# Altium PCB Power.PcbDoc
Units mm, origin at the board's own origin, x right, y up, seen from the top; angles counter-clockwise.
Board outline 152.4 x 101.6 mm, 2 copper layers (Top Layer, Bottom Layer); 9 components, 8 nets, 54 pads, 0 vias.
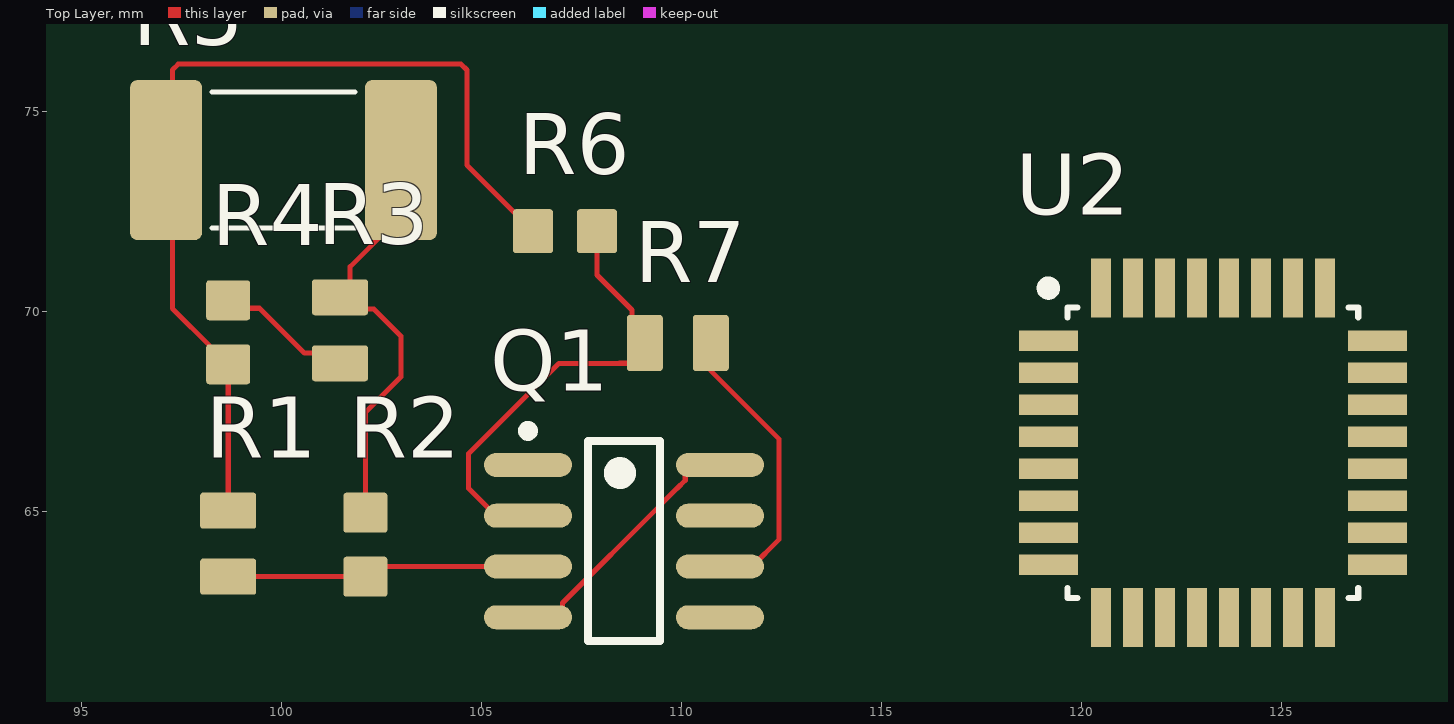
[diagram p0: Top Layer view]
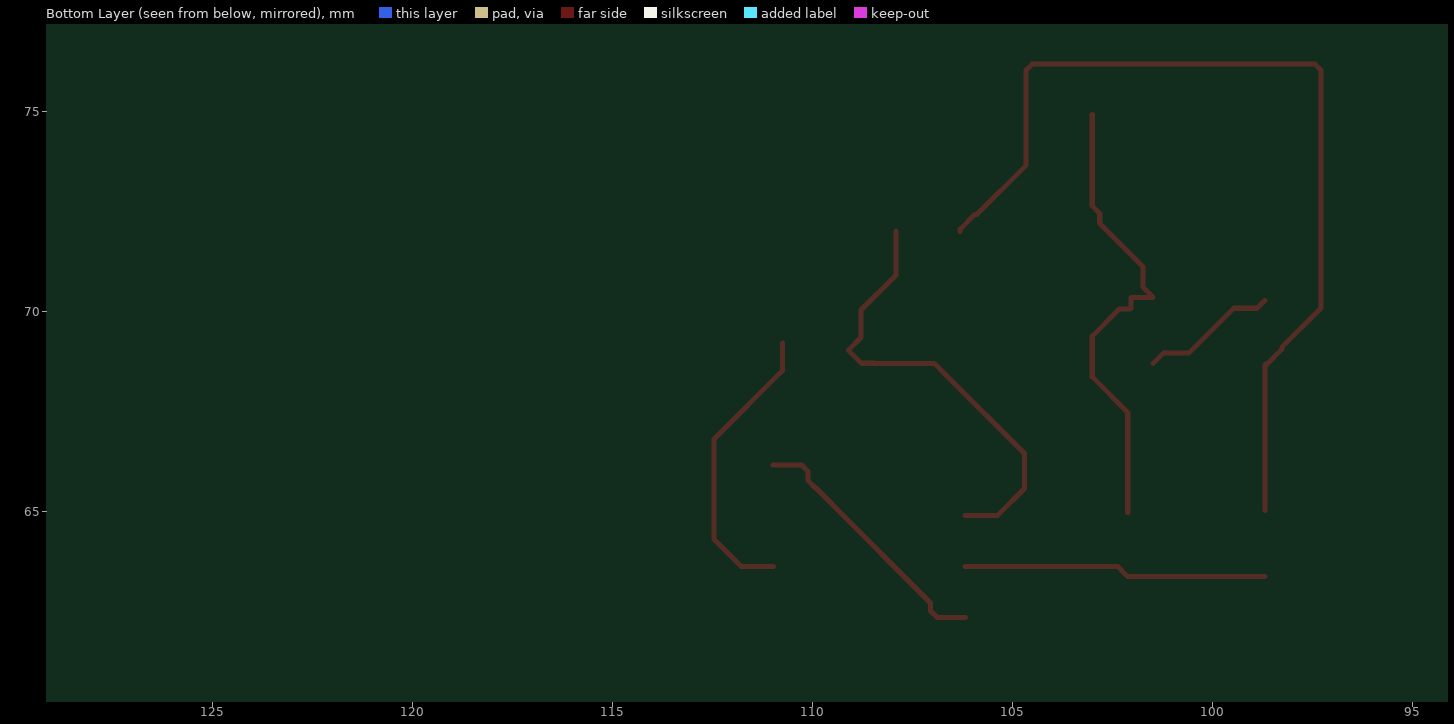
[diagram p1: Bottom Layer view, seen from below]
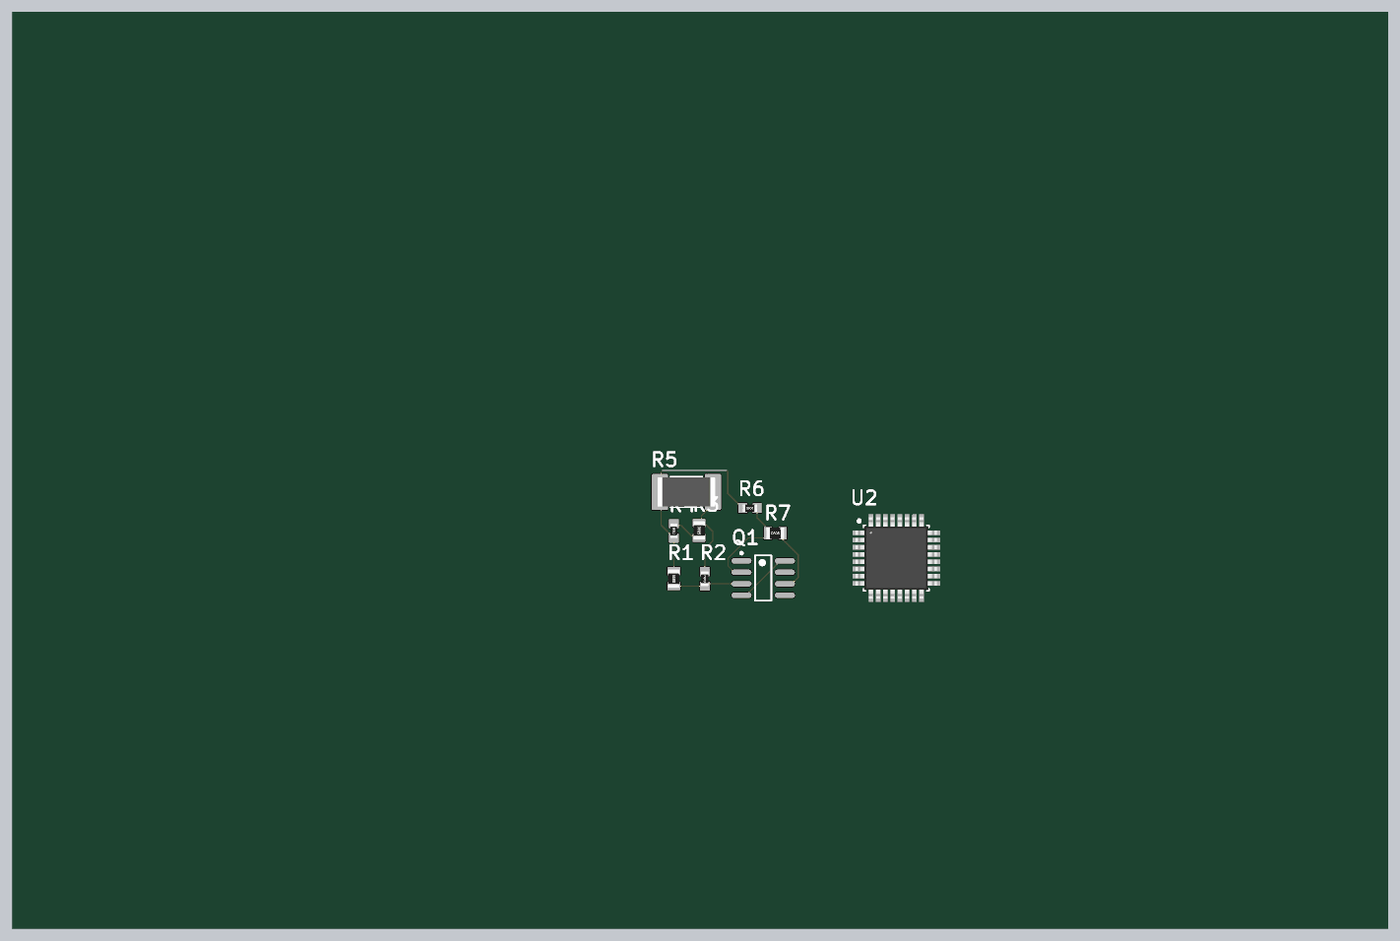
[diagram p2: 3D render of the assembled board from above, using the file's embedded part models]

## Layer stack, top to bottom
Top Solder: solder mask 0.0102, Solder Resist, Dk 3.5
Top Layer: signal copper 0.0356
Dielectric 1: dielectric 0.32, FR-4, Dk 4.8
Bottom Layer: signal copper 0.0356
Bottom Solder: solder mask 0.0102, Solder Resist, Dk 3.5

## Board outline
25.4,25.4 177.8,25.4 177.8,127 25.4,127

## Design rules (kind name [scope] priority, off if disabled: settings)
Clearance [All] p1: gap=0.254 ignorepadtopadclearanceinfootprint=FALSE
PolygonConnect [All] p1: connectstyle=Relief reliefconductorwidth=0.254 reliefentries=4 polygonreliefangle="90 Angle" airgapwidth=0.254
RoutingVias [All] p1: holewidth=0.711 width=1.27 viastyle="Through Hole" minholewidth=0.711 minwidth=1.27 maxholewidth=0.711 maxwidth=1.27
SolderMaskExpansion [All] p1: expansion=0.102 istentingtop=FALSE
SupplyNets "Schematic Supply Nets_2" [InNet('VIN')] p1: voltage=0.000
SupplyNets "Schematic Supply Nets_1" [InNet('GND')] p2: voltage=0.000
SupplyNets "Schematic Supply Nets" [InNet('5V')] p3: voltage=0.000
Width [All] p1: maxlimit=0.254 minlimit=0.254 preferedwidth=0.254
30 further rules are at their usual default settings.

## Classes and differential pairs
component class Power: Q1 R1 R2 R3 R4 R5 R6 R7
component class MCU: U2

## Components (designator, comment, footprint, x,y, rotation, side; value= is the part's Value field where it differs from the comment)
Q1 "OPAMP_CA3140AMZ" CA3140AMZ 108.572,64.262 r0 top
R1 "RES_10kΩ_0805_5%" RES0805 98.679,64.198 r90 top value=10kΩ
R2 "RES_1kΩ_0603_5%" RES0603 102.108,64.973 r270 top value=1kΩ
R3 "RES_10kΩ_0805_5%" RES0805 101.473,69.532 r270 top value=10kΩ
R4 "RES_1kΩ_0603_5%" RES0603 98.679,70.282 r270 top value=1kΩ
R5 "RES_1mΩ_2512_1%" RESC6532X75N 100.062,73.787 r180 top value=1mΩ
R6 "RES_1kΩ_0603_5%" RES0603 106.299,72.009 r0 top value=1kΩ
R7 "RES_10kΩ_0805_5%" RES0805 109.918,69.215 r0 top value=10kΩ
U2 "STM32F042K6T6TR" LQFP-32 123.298,66.472 r0 top

## Footprints (in the part's own frame and the unit in brackets; to place one, negate y for a bottom-side part, rotate by r counter-clockwise, add the part's x,y. Pads: shape width x height; smd on the part's side, far side on the other; paste and mask are expansions set on the pad)
CA3140AMZ [mm]
  oval 2.2x0.6 smd: 1(-2.4,1.905) 2(-2.4,0.635) 3(-2.4,-0.635) 4(-2.4,-1.905) 5(2.4,-1.905) 6(2.4,-0.635) 7(2.4,0.635) 8(2.4,1.905)
  silkscreen extent -2.52,-2.5 0.9,2.88, body extent -2,-2.5 2,2.5, height 1.75
LQFP-32 [mil]
  rect 58x20 smd paste+0 mask+0: 1(-162,110.24) 2(-162,78.74) 3(-162,47.24) 4(-162,15.75) 5(-162,-15.75) 6(-162,-47.24) 7(-162,-78.74) 8(-162,-110.24) 17(162,-110.24) 18(162,-78.74) 19(162,-47.24) 20(162,-15.75) 21(162,15.75) 22(162,47.24) 23(162,78.74) 24(162,110.24)
  rect 20x58 smd paste+0 mask+0: 9(-110.24,-162) 10(-78.74,-162) 11(-47.24,-162) 12(-15.75,-162) 13(15.75,-162) 14(47.24,-162) 15(78.74,-162) 16(110.24,-162) 25(110.24,162) 26(78.74,162) 27(47.24,162) 28(15.75,162) 29(-15.75,162) 30(-47.24,162) 31(-78.74,162) 32(-110.24,162)
  silkscreen extent -168,-143 143,168, body extent -177,-177 177,177, height 63
RES0603 [mm] "Chip Resistor, Body 1.6x0.8mm, IPC Medium Density"
  rrect15% 1x1.1 smd: 1(0,0) 2(1.6,0)
  body extent 0,-0.4 1.6,0.4, height 0.46
RES0805 [mm] "Chip Resistor, 2-Leads, Body 2.00x1.25mm, IPC High Density"
  rrect15% 0.9x1.4 smd: 1(-0.825,0) 2(0.825,0)
  body extent -1,-0.62 1,0.63, height 0.61
RESC6532X75N [mm]
  rrect20% 1.8x4 smd: 1(-2.935,0) 2(2.935,0)
  silkscreen extent -1.79,-1.7 1.79,1.7, body extent -3.17,-1.6 3.17,1.6, height 0.65

## Part data
Q1: "IC OPAMP GP 1 CIRCUIT 8SOIC", Manufacturer 1="Renesas Electronics America Inc.", Manufacturer Part Number 1=CA3140AMZ, Supplier Part Number 1=CA3140AMZ-ND, Supplier 1=Digi-Key
R1 R3 R7: "RES 10K OHM 5% 1/8W 0805", LCSC Part #=C17414, Manufacturer 1="Panasonic Electronic Components", Manufacturer Part Number 1=ERJ-6GEYJ103V, Package/Footprint=0805, Supplier Part Number 1=P10KACT-ND, Mounting Type=SMD, Supplier 1=Digi-Key
R2 R4 R6: "RES 1K OHM 5% 1/10W 0603", Manufacturer 1=Yageo, Manufacturer Part Number 1=RC0603JR-071KL, Package=0603, Supplier Part Number 1=311-1.0KGRCT-ND, Mounting Type=SMD, Supplier 1=Digi-Key
R5: "RES 1 mOHM 1% 3W 2512", Manufacturer 1=Riedon, Manufacturer Part Number 1=CSRL3-0R001F8, Package=2512, Supplier Part Number 1=696-1834-1-ND, Mounting Type=SMD, Supplier 1=Digi-Key
U2: "ARM® Cortex®-M0 STM32F0 Microcontroller IC 32-Bit Single-Core 48MHz 32KB (32K x 8) FLASH 32-LQFP (7x7)", Mfr_Name=STMicroelectronics, Operating Temperature="-40°C ~ 85°C (TA)", Package / Case=32-LQFP, Supplier Part Number 1=16AC3527, Voltage - Supply (Vcc/Vdd)="2V ~ 3.6V", ComponentLink1Description=digikey, ComponentLink1URL=https://www.digikey.com/en/products/detail/stmicroelectronics/STM32F042K6T6TR/10414582, Core Processor="ARM® Cortex®-M0", Core Size="32-Bit Single-Core", Program Memory Size="32KB (32K x 8)", Speed=48MHz, Supplier 1=Avnet

## Nets (pads, with @x,y where several pads share a name; then routed paths per layer and width w, separated by ;. In a path a pad name is that pad's centre, name@x,y a point inside that pad or via, vN(x,y) a via of type N, cw(c..) or ccw(c..) an arc to the next point about the centre after c; other vN are vias at no path point)
5V: Q1.4 Q1.8 | length 6.6
  Top Layer w0.127: Q1.4 106.878,62.357 107.038,62.517 107.038,62.715 109.491,65.168 109.491,65.179 109.89,65.578 109.901,65.578 110.106,65.783 110.106,66.007 110.266,66.167 Q1.8
GND: R1.2 R4.2 R5.2 R6.1 | length 23.9
  Top Layer w0.127: R1.2 R4.2 98.629,68.682 98.256,69.055 98.256,69.105 97.282,70.079 97.282,76.037 97.431,76.186 104.499,76.186 104.648,76.037 104.648,73.66 105.876,72.432 105.926,72.432 106.299,72.059 R6.1
NetQ1_2: Q1.2 R6.2 R7.1 | length 11.6
  Top Layer w0.127: Q1.2 105.372,64.897 104.691,65.578 104.691,66.449 106.676,68.435 106.948,68.706 108.457,68.706 108.459,68.708 108.77,68.708 109.094,69.032 108.776,69.35 108.776,70.04 107.899,70.917 R6.2
NetQ1_3: Q1.3 R1.1 R2.2 | length 7.6
  Top Layer w0.127: R1.1 R2.2 102.362,63.627 Q1.3
NetQ1_6: Q1.6 R7.2 | length 7.4
  Top Layer w0.127: R7.2 110.744,68.519 112.453,66.81 112.453,64.308 111.772,63.627 Q1.6
NetR3_2: R3.2 R4.1 | length 3.4
  Top Layer w0.127: R4.1 98.877,70.084 99.461,70.084 100.585,68.96 101.22,68.96 R3.2
NetU2_6: U2.6
VIN: R2.1 R3.1 R5.1 | length 12.1
  Top Layer w0.127: R2.1 102.108,67.479 102.997,68.368 102.997,69.384 102.319,70.062 102.046,70.062 102.024,70.084 102.024,70.357 R3.1 101.727,70.611 101.727,71.123 102.808,72.204 102.808,72.454 102.997,72.643 R5.1 R5.1@102.997,74.93
pads on no net: Q1.1 Q1.5 Q1.7 U2.1 U2.2 U2.3 U2.4 U2.5 U2.7 U2.8 U2.9 U2.10 U2.11 U2.12 U2.13 U2.14 U2.15 U2.16 U2.17 U2.18 U2.19 U2.20 U2.21 U2.22 U2.23 U2.24 U2.25 U2.26 U2.27 U2.28 U2.29 U2.30 U2.31 U2.32

## Text inside footprints (layer, text, board x,y; h text height)
U2: Mechanical 13 "*" at 119.856,69.037 h1.27